# Altium PCB PMP.PcbDoc (part 2 of 2)
Units mil, origin at the board's own origin, x right, y up, seen from the top; angles counter-clockwise.
Board outline 5476.1 x 4612.44 mil, 2 copper layers (Top Layer, Bottom Layer); 198 components, 133 nets, 635 pads, 71 vias.
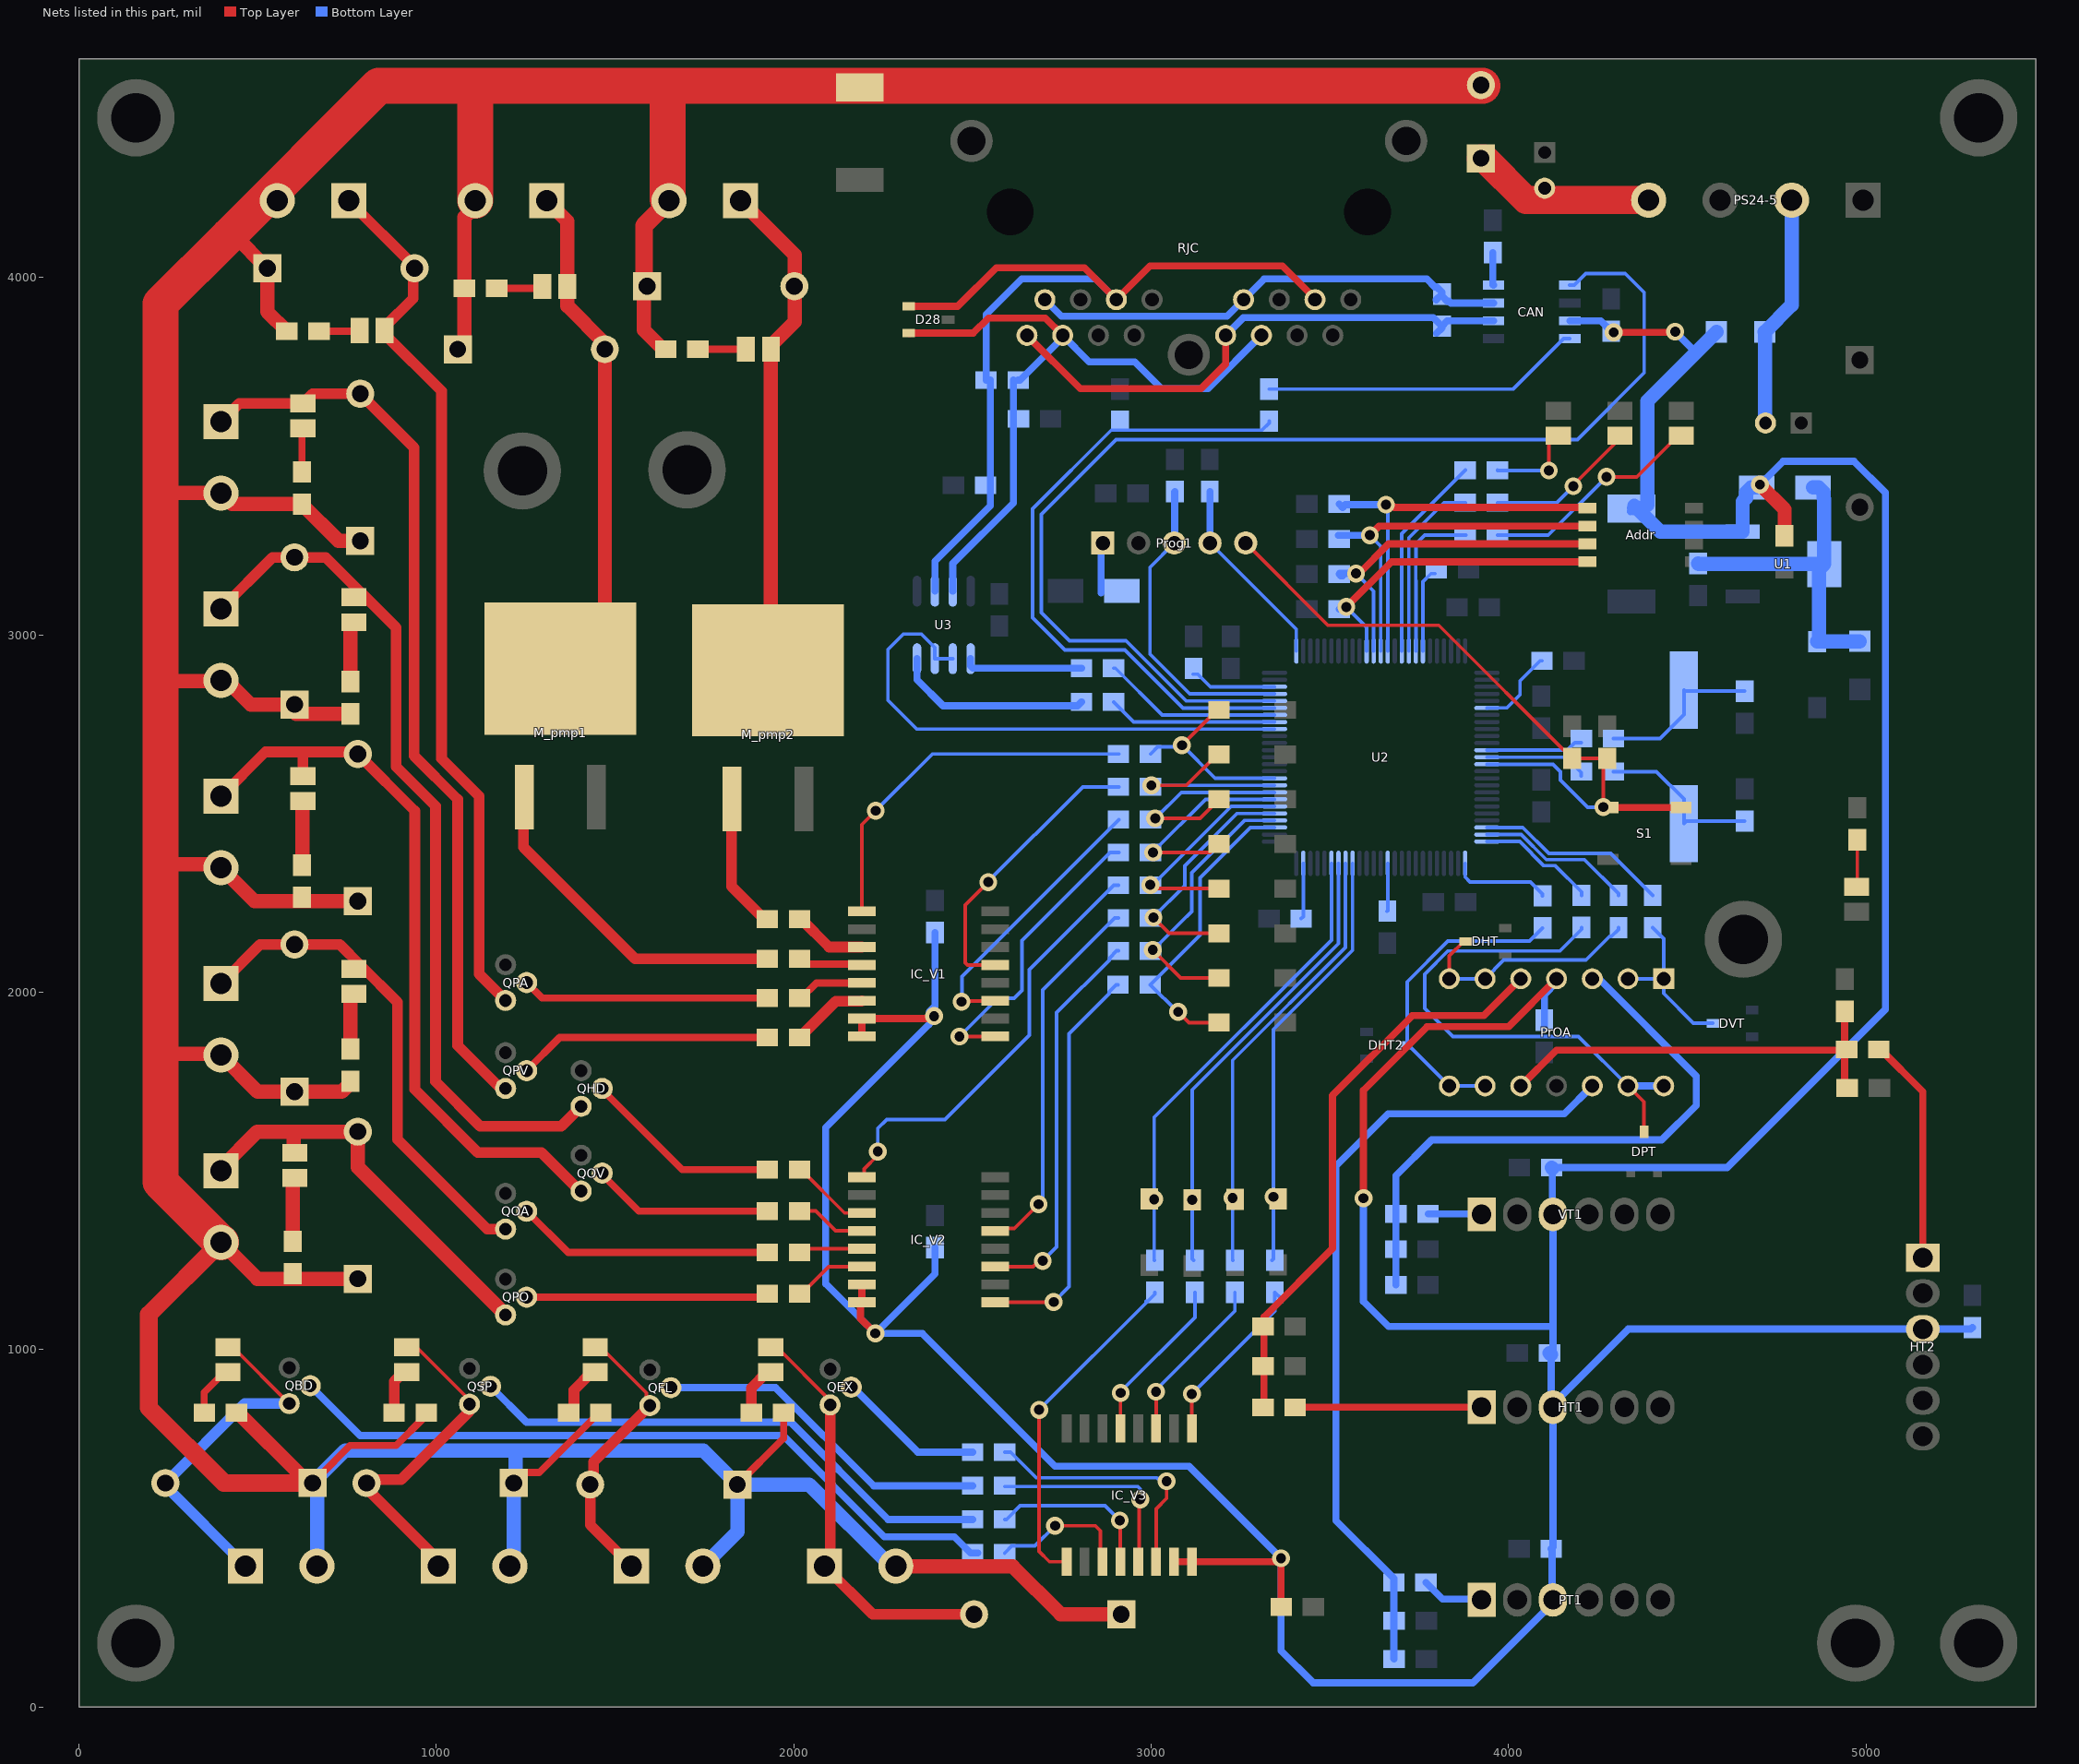
[diagram p2: the nets of this part, all layers, seen from the top]

## Via types
v1: diameter 50, hole 28, Top Layer to Bottom Layer, 71 vias

## Nets (pads, with @x,y where several pads share a name; then routed paths per layer and width w, separated by ;. In a path a pad name is that pad's centre, name@x,y a point inside that pad or via, vN(x,y) a via of type N, cw(c..) or ccw(c..) an arc to the next point about the centre after c; other vN are vias at no path point) (continued)
+5: C1.1 C4.1 C5.1 C7.1 C25.2 C26.1 C27.2 C28.2 C29.2 C30.2 CAN.3 D11.2 D13.1 FU3.2 HT1.3 HT2.3 IC_V1.15 IC_V1.16 IC_V2.15 IC_V2.16 IC_V3.15 IC_V3.16 PrOA.4 PT1.3 U1.3 VT1.3 | length 14117.7
  Top Layer w20: IC_V2.15@2190.55,1182.09 IC_V2.16@2190.55,1132.09 2186.81,1128.34 2186.81,1086.58 v1(2228.46,1044.92) ; IC_V1.16@2190.55,1876.18 IC_V1.15@2190.55,1926.18 2385.83,1926.18 v1(2392.72,1933.07) ; IC_V3.15@3063.98,406.1 IC_V3.16@3113.98,406.1 3354.02,406.1 v1(3363.7,415.79) 3363.7,280.24 C28.2@3364.17,279.76 ; v1(3594.21,1423.46) 3594.21,1725.63 3772.36,1903.78 4000.51,1903.78 PrOA.4@4134.37,2037.64 ; v1(4294.31,3846.69) 4464.29,3846.69 v1(4466.26,3848.66)
  Top Layer w39.37: v1(4703.46,3420.51) 4772.36,3351.61 C26.1@4772.36,3277.24
  Bottom Layer w20: v1@2379.92,1945.87 2395.39,1961.34 C30.2@2395.39,2166.85 ; v1(2392.72,1933.07) 2392.72,1924.95 2378.25,1910.49 2378.25,1909.75 2089.29,1620.79 2089.29,1184.09 v1(2228.46,1044.92) ; C29.2@2395.39,1284.96 2395.39,1211.85 v1(2228.46,1044.92) ; v1(3594.21,1423.46) 3594.21,1134.09 3664.09,1064.21 4121.57,1064.21 4124.53,1067.17 ; C27.2@4100.39,1902.8 4100.39,1993.24 4134.37,2027.22 PrOA.4@4134.37,2037.64 PrOA.4@4135.45,2036.56 ; C5.1@4114.61,990.39 4124.53,1000.32 4124.53,1067.17 ; HT1.3@4119.57,843.78 C5.1@4119.57,985.43 ; C4.1@4120.51,1509.09 4611.93,1509.09 5054.84,1952.01 5054.84,3397.87 4967.24,3485.47 4768.43,3485.47 v1(4703.46,3420.51) ; VT1.3@4122.52,1380.2 C4.1@4122.52,1507.09 ; VT1.3@4124.53,1378.19 4124.53,1067.17 ; CAN.3@4171.46,3878.78 4258.27,3878.78 C25.2@4287.13,3849.92 ; D13.1@4341.26,3344.72 D13.1@4351.52,3354.98 ; v1(4466.26,3848.66) 4524.54,3790.38 ; C7.1@5297.95,1061.54 5293.54,1057.13 HT2.3@5159.17,1057.13 4334.96,1057.13 4124.53,846.69 HT1.3@4124.53,838.82 4124.53,447.17 C1.1@4119.53,442.17 4122.03,439.67 4122.03,301.95 PT1.3@4124.53,299.45 4124.53,291.57 3900.12,67.17 3453.46,67.17 3363.7,156.93 v1(3363.7,415.79) 3106.02,673.46 2731.02,673.46 2359.57,1044.92 v1(2228.46,1044.92)
  Bottom Layer w39.37: C5.1@4114.61,990.39 C5.1@4119.57,985.43 ; HT1.3@4119.57,843.78 HT1.3@4124.53,838.82 ; C4.1@4120.51,1509.09 C4.1@4122.52,1507.09 ; VT1.3@4122.52,1380.2 VT1.3@4124.53,1378.19 ; D13.1@4352.09,3361.46 4358.56,3354.98 4424.92,3288.62 U1.3@4655.24,3288.62 4655.24,3373.27 4665.08,3383.11 4665.08,3398.86 4678.86,3412.64 D11.2@4694.61,3412.64 ; D11.2@4698.54,3420.51 v1(4703.46,3420.51)
  Bottom Layer w40: D13.1@4351.52,3354.98 4358.56,3354.98 4379.07,3354.98 4388.19,3364.09 4388.19,3654.04 4524.54,3790.38 FU3.2@4581.83,3847.68
+24: BD.2 D1.2 D2.2 D3.2 D4.2 D5.2 D6.2 D7.2 D8.2 D9.2 D10.2 D12.1 D15.2 D16.2 EX.2 FL.2 FU2.2 HD.2 OA.2 OV.2 PA.2 PO.2 Pump1.2 Pump2.2 PV.2 R10.1 R29.1 R30.1 R31.1 R32.1 R33.1 R34.1 R35.1 R36.1 R37.1 R44.1 R45.1 SP.2 | length 17119.2
  Top Layer w20: D1.2@634.09,645.59 672.83,645.59 758.78,731.54 887.52,731.54 966.89,810.91 966.89,823.07 R32.1@971.89,823.07 ; D5.2@1216.46,626.22 1245.83,655.59 1287.6,655.59 1455.08,823.07 R30.1@1460.08,823.07 ; D2.2@1842.24,622.28 1971.61,751.65 R33.1@1971.61,823.07
  Top Layer w40: 228.07,1827.01 394.41,1827.01 OA.2@397.36,1824.06 499.72,1721.69 D10.2@603.07,1721.69 735.47,1721.69 759.57,1745.79 R34.1@759.57,1750.79 ; 228.07,2357.52 388.11,2357.52 OV.2@397.36,2348.27 490.67,2254.96 D7.2@780.24,2254.96 ; 228.07,2870.31 395.2,2870.31 HD.2@397.36,2872.48 413.17,2872.48 480.49,2805.16 D8.2@581.42,2805.16 ; 228.07,3367.36 257.4,3396.69 PV.2@397.36,3396.69 428.11,3365.95 R35.1@623.74,3365.95 726.65,3263.03 D9.2@780.24,3263.03 ; PO.2@397.36,1299.84 499.33,1197.87 D16.2@780.24,1197.87 ; 419.51,4117.85 435.06,4117.85 D3.2@527.09,4025.83 527.09,3904.25 R36.1@581.69,3849.65 ; R31.1@440.67,823.07 445.67,823.07 623.15,645.59 634.09,645.59 D1.2@653.46,626.22 ; D8.2@603.07,2805.16 D8.2@581.42,2805.16 ; R29.1@759.57,2779.06 607.52,2779.06 D8.2@581.42,2805.16 ; D4.2@1059.76,3799.45 1078.66,3818.35 R44.1@1078.66,3969.72 1078.66,4169.09 1108.98,4199.4 Pump1.2@1108.98,4215.21 Pump1.2@1116.85,4207.34 ; D15.2@1581.22,3974.45 1581.22,3852.8 R45.1@1638.15,3795.87 ; EX.2@2285.75,392.95 2612.91,392.95 2746.77,259.09 D6.2@2916.26,259.09
  Top Layer w50: PO.2@397.36,1299.84 195.59,1098.07 195.59,836.85 406.22,626.22 D1.2@653.46,626.22 ; D15.2@1575.51,3968.74 1581.22,3974.45 1581.22,4145.13 Pump2.2@1651.3,4215.21 Pump2.2@1647.36,4219.15
  Top Layer w100: PO.2@397.36,1299.84 228.07,1469.13 228.07,1827.01 228.07,2357.52 228.07,2870.31 228.07,3367.36 228.07,3926.42 419.51,4117.85 838.31,4536.65 1108.98,4536.65 ; Pump1.2@1108.98,4215.21 1108.98,4536.65 ; Pump2.2@1647.36,4219.15 1647.36,4536.65 ; FU2.2@3927.87,4536.65 1647.36,4536.65 ; 1108.98,4536.65 1647.36,4536.65
  Bottom Layer w40: BD.2@678.07,392.95 667.05,403.98 667.05,612.64 D1.2@653.46,626.22 745,717.76 1221.18,717.76 ; SP.2@1178.07,392.95 1216.46,431.34 D5.2@1216.46,626.22 1221.18,630.95 1221.18,717.76 ; FL.2@1745.79,392.95 1842.24,489.41 D2.2@1842.24,622.28 ; EX.2@2287.13,393.35 2271.8,393.35 2042.87,622.28 D2.2@1842.24,622.28 ; 1221.18,717.76 1746.77,717.76 D2.2@1842.24,622.28
A_RESET: C13.2 Prog1.5 R51.1 S1.1 U2.14 | length 2004.4
  Top Layer w10: Prog1.5@3264.69,3257.13 3495,3026.81 3805.12,3026.81 C13.2@4177.87,2654.06 R51.1@4265.47,2654.06 ; v1(4265.47,2517.95) R51.1@4265.47,2654.06 ; R51.1@4276.3,2654.06 R51.1@4265.47,2654.06
  Top Layer w20: S1.1@4265.47,2516.97 S1.1@4278.27,2516.97 S1.1@4482.99,2516.97
  Bottom Layer w10: U2.14@3939.68,2638.03 4124.72,2638.03 4145.39,2617.36 4145.39,2593.74 4221.18,2517.95 v1(4265.47,2517.95)
ad0: Addr.1 R12.1 U2.89 | length 1098.9
  Top Layer w20: v1(3657.2,3364.41) 3671.97,3364.41 3679.84,3356.54 Addr.1@4202.87,3356.54
  Bottom Layer w10: v1(3657.2,3364.41) 3662.13,3359.49 U2.89@3662.13,2954.96
  Bottom Layer w20: R12.1@3526.02,3366.38 3535.87,3356.54 3542.76,3363.43 3543.74,3364.41 v1(3657.2,3364.41)
ad1: Addr.2 R14.1 U2.88 | length 1043.4
  Top Layer w20: v1(3611.93,3278.78) 3637.72,3304.57 Addr.2@4220.59,3304.57
  Bottom Layer w10: v1(3611.93,3278.78) 3642.44,3248.27 U2.88@3642.44,2954.96
  Bottom Layer w20: R14.1@3524.33,3278.78 v1(3611.93,3278.78)
ad2: Addr.3 R22.1 U2.87 | length 978.8
  Top Layer w20: v1(3573.22,3171.82) 3581.75,3171.82 3664.49,3254.57 Addr.3@4220.59,3254.57
  Bottom Layer w10: v1(3573.22,3171.82) 3622.76,3122.28 U2.87@3622.76,2954.96
  Bottom Layer w20: R22.1@3535.98,3165.43 3530.78,3165.43 R22.1@3526.02,3170.18 3527.66,3171.82 v1(3573.22,3171.82)
boot: R54.1 U2.94 | length 236.7
  Bottom Layer w10: U2.94@3760.55,2954.96 3760.55,3148.86 3783.19,3171.5 R54.1@3794.02,3171.5
CANH: CAN.7 R65.1 RJC.7 RJC.15 | length 1374
  Bottom Layer w20: RJC.15@2702.68,3938.23 2749.07,3891.84 3212.19,3891.84 RJC.7@3258.58,3938.23 3316.65,3996.3 3771.1,3996.3 3793.7,3973.7 3798.7,3973.7 3813.7,3958.7 R65.1@3813.7,3953.7 ; R65.1@3797.83,3937.83 R65.1@3813.7,3953.7 ; CAN.7@3957.91,3928.78 3838.62,3928.78 3833.7,3933.7 3828.7,3933.7 3813.7,3948.7 R65.1@3813.7,3953.7
CANL: CAN.6 R65.2 RJC.8 RJC.16 | length 1538.7
  Top Layer w20: RJC.16@2652.68,3838.23 2801.69,3689.21 3139.49,3689.21 3208.58,3758.31 RJC.8@3208.58,3838.23
  Bottom Layer w20: RJC.8@3208.58,3838.23 3258.39,3888.03 3789.37,3888.03 R65.2@3813.7,3863.7 ; R65.2@3798.7,3843.7 3813.7,3858.7 R65.2@3813.7,3863.7 ; CAN.6@3957.91,3878.78 3828.7,3878.78 3813.7,3863.78 R65.2@3813.7,3863.7
CANRX: R68.2 R70.1 U2.70 | length 1852.8
  Bottom Layer w10: R68.2@3330.43,3597.95 3330.43,3592.95 3310.43,3572.95 2888.39,3572.95 2668.38,3352.94 2668.38,3048.09 2758.55,2957.91 2926.89,2957.91 3089.29,2795.51 U2.70@3345.2,2795.51
CANRXo: CAN.4 R68.1 | length 899.4
  Bottom Layer w10: R68.1@3330.43,3687.95 3952.17,3687.95 4013.41,3687.95 4154.23,3828.78 CAN.4@4171.46,3828.78
CANTX: CAN.1 U2.71 | length 3348.8
  Bottom Layer w10: U2.71@3345.2,2815.2 3098.15,2815.2 2929.84,2983.5 2771.38,2983.5 2692.64,3062.24 2692.64,3336.85 2902.28,3546.5 4192.64,3546.5 4379.65,3733.5 4379.65,3957.91 4326.5,4011.06 4216.26,4011.06 4183.98,3978.78 CAN.1@4171.46,3978.78
D+: D28.1 R58.2 R59.1 RJC.3 RJC.11 U3.6 | length 2566.9
  Top Layer w19.68: D28.1@2321.57,3919.53 2458.39,3919.53 2566.65,4027.8 2813.11,4027.8 RJC.11@2902.68,3938.23 2997.17,4032.72 3367.83,4032.72 RJC.3@3460.45,3940.1
  Bottom Layer w19.68: U3.6@2395,3122.28 2395,3206.54 2549.92,3361.46 R59.1@2549.92,3712.83 ; R59.1@2538.11,3712.83 2538.11,3896.89 2637.52,3996.3 2844.61,3996.3 RJC.11@2902.68,3938.23
D-: D28.2 R59.2 R60.1 RJC.6 RJC.14 U3.7 | length 1991.8
  Top Layer w19.68: D28.2@2323.54,3842.76 D28.2@2321.57,3844.72 2502.68,3844.72 2545,3887.05 2703.86,3887.05 RJC.14@2752.68,3838.23
  Bottom Layer w19.68: U3.7@2445,3122.28 2445,3199.45 2614.88,3369.33 R59.2@2614.88,3712.83 ; R59.2@2628.11,3712.83 2633.11,3712.83 2752.68,3832.4 RJC.14@2752.68,3838.23 2826.89,3764.02 2954.45,3764.02 3029.25,3689.21 3159.57,3689.21 RJC.6@3308.58,3838.23
DHT: DHT.3 PrOA.6 PrOA.7 R42.1 | length 662.5
  Top Layer w10: PrOA.7@3834.37,2037.64 3834.37,2101.61 3874.72,2141.97 DHT.3@3880.63,2141.97
  Bottom Layer w10: PrOA.7@3834.37,2037.64 PrOA.6@3934.37,2037.64 3986.54,2089.8 4216.97,2089.8 4282.8,2155.63 4287.8,2155.63 4307.8,2175.63 R42.1@4307.8,2180.63
DHT2: DHT2.3 PrOA.8 PrOA.9 R39.1 | length 881.5
  Bottom Layer w10: PrOA.9@3934.37,1737.64 PrOA.8@3834.37,1737.64 3716.85,1855.16 3716.26,1855.75 3716.26,2028.78 3830.43,2142.95 4058.5,2142.95 R39.1@4095.2,2179.65
DPT: DPT.3 PrOA.13 PrOA.14 R62.1 | length 1492.9
  Top Layer w10: PrOA.13@4334.37,1737.64 4378.66,1693.35 DPT.3@4378.66,1613.43
  Bottom Layer w10: R62.1@4204.45,2180.91 4204.45,2175.91 4143.94,2115.39 3830.43,2115.39 3765.47,2050.43 3765.47,1954.96 3844.21,1876.22 4195.79,1876.22 PrOA.13@4334.37,1737.64
  Bottom Layer w20: PrOA.13@4334.37,1737.64 PrOA.14@4434.37,1737.64
DVT: DVT.3 PrOA.1 PrOA.2 R43.2 | length 468.4
  Bottom Layer w10: PrOA.2@4334.37,2037.64 PrOA.1@4434.37,2037.64 ; R43.2@4403.27,2180.63 4434.37,2149.53 PrOA.1@4434.37,2037.64 ; DVT.3@4571.57,1913.62 4517.44,1913.62 4434.37,1996.69 PrOA.1@4434.37,2037.64
EN_max: U2.67 U3.2 U3.3 | length 1503.3
  Bottom Layer w10: U3.2@2445,2933.31 U3.3@2395,2933.31 2395,2964.8 2357.6,3002.2 2306.81,3002.2 2263.5,2958.9 2263.5,2817.17 2344.21,2736.46 U2.67@3345.2,2736.46
HT: R42.2 U2.24 | length 441.7
  Bottom Layer w10: U2.24@3939.68,2441.18 4035.72,2441.18 4105.87,2371.03 4212.39,2371.03 4307.8,2275.63 R42.2@4307.8,2270.63
HT2: R39.2 U2.26 | length 279.6
  Bottom Layer w10: U2.26@3878.66,2360.47 3878.66,2322.09 3892.44,2308.31 4061.54,2308.31 4095.2,2274.65 R39.2@4095.2,2269.65
HT2P: C9.1 PrOA.10 R38.2 R57.1 | length 1171.5
  Top Layer w20: PrOA.10@4034.37,1737.64 4134.57,1837.83 R57.1@4940.67,1837.83 ; C9.1@4940.67,1946.38 R57.1@4940.67,1837.83 ; R57.1@4946.57,1837.83 R57.1@4940.67,1837.83 ; R38.2@4947.83,1731.54 4940.67,1738.7 R57.1@4940.67,1837.83
HTP: C6.1 PrOA.5 R25.2 R26.1 | length 1608.8
  Top Layer w20: R26.1@3315.67,843.74 3315.67,952.99 3315.67,1064.21 3315.67,1090.79 3507.6,1282.72 3507.6,1710.87 3731.02,1934.29 3931.02,1934.29 PrOA.5@4034.37,2037.64
in5: C10.2 FU3.1 PS24-5.2 | length 673.1
  Bottom Layer w40: C10.2@4714.29,3592.76 C10.2@4719.21,3592.76 4718.02,3593.95 4718.02,3846.49 FU3.1@4716.83,3847.68 4792.24,3923.09 PS24-5.2@4792.24,4216.77 ; PS24-5.2@4796.97,4216.77 4796.97,4212.05 PS24-5.2@4802.09,4206.93
in24: C8.2 FU2.1 PS24-5.4 | length 517.7
  Top Layer w78.74: FU2.1@3922.95,4333.7 3932.01,4333.7 4048.94,4216.77 4125.71,4216.77 PS24-5.4@4392.24,4216.77
LEDB: R49.1 U2.92 | length 515.3
  Bottom Layer w10: U2.92@3721.18,2954.96 3721.18,3271.89 3819.11,3369.82 R49.1@3878.94,3369.82
LEDR: R50.1 U2.91 | length 579.4
  Bottom Layer w10: U2.91@3701.5,2954.96 3701.5,3283.42 R50.1@3878.94,3460.87
LEDY: R48.1 U2.93 | length 449.1
  Bottom Layer w10: U2.93@3740.87,2954.96 3740.87,3151.97 3740.48,3152.35 3740.48,3212.29 3740.87,3212.68 3740.87,3254.17 3765.47,3278.78 R48.1@3878.94,3278.78 R48.1@3880.2,3278.78
NetB.D_1: B.D.2 R31.2 | length 146.5
  Top Layer w20: R31.2@350.67,823.07 350.67,879.88 407.05,936.26 B.D.2@417.05,936.26
NetC12_2: C12.2 U2.6 | length 230.8
  Bottom Layer w10: U2.6@3939.68,2795.51 3940.03,2795.86 3995.15,2795.86 4032.2,2832.91 4032.2,2871.1 4088.5,2927.4 C12.2@4093.5,2927.4
Netc14_1: c14.1 R52.2 x1.2 | length 465.4
  Bottom Layer w10: R52.2@4293.74,2709.88 4423.94,2709.88 4490.87,2776.81 x1.2@4490.87,2845.71 4494.09,2842.48 c14.1@4661.14,2842.48
Netc15_1: c15.1 R53.1 x1.1 | length 471.1
  Bottom Layer w10: R53.1@4293.74,2617.36 4414.09,2617.36 4490.87,2540.59 x1.1@4490.87,2471.69 4498.03,2478.86 c15.1@4661.14,2478.86
NetC16_1: C16.1 U2.49 | length 159
  Bottom Layer w10: C16.1@3419.72,2205.94 C16.1@3425.91,2212.13 ; C16.1@3424.92,2210.59 3425.91,2211.57 C16.1@3425.91,2212.13 ; U2.49@3425.91,2360.47 C16.1@3425.91,2212.13
NetC17_1: C17.1 U2.73 | length 243
  Bottom Layer w10: C17.1@3116.85,2890 3130.63,2890 3166.06,2854.57 U2.73@3345.2,2854.57
NetCAN_8: CAN.8 R63.2 | length 92
  Bottom Layer w20: R63.2@3956.42,4070.12 3956.42,3980.28 CAN.8@3957.91,3978.78
NetD14_2: D14.2 Prog1.1 | length 141.7
  Bottom Layer w19.68: 2859.96,3117.36 2859.96,3252.4 Prog1.1@2864.68,3257.13
NetE.X_1: E.X.2 R33.2 | length 141.5
  Top Layer w30: R33.2@1881.61,823.07 1881.61,892.13 1925.75,936.26 E.X.2@1935.75,936.26
NetF.L_1: F.L.2 R30.2 | length 152.8
  Top Layer w30: R30.2@1370.08,823.07 1375.08,823.07 1385.08,833.07 1385.08,886.73 1434.61,936.26 F.L.2@1444.61,936.26
NetH.D_1: H.D.2 R29.2 | length 173
  Top Layer w40: R29.2@759.57,2869.06 759.57,3030.12 764.57,3035.12 H.D.2@769.41,3035.12
NetHT1_1: HT1.1 R26.2 | length 536.6
  Top Layer w19.68: R26.2@3399.06,838.82 3916.65,838.82 3924.53,830.94 HT1.1@3924.53,838.82
NetHT2_1: HT2.1 R57.2 | length 636.6
  Top Layer w20: R57.2@5036.14,1839.8 5041.14,1839.8 5159.17,1721.77 HT2.1@5159.17,1257.13
NetIC_V1_1: IC_V1.1 R11.2 | length 840.8
  Top Layer w10: v1(2463.58,1875.98) 2463.68,1876.08 2563.29,1876.08 IC_V1.1@2563.39,1876.18
  Bottom Layer w10: v1(2463.58,1875.98) 2570.83,1983.23 2617.17,1983.23 2638.78,2004.84 2638.78,2144.21 2885.69,2391.12 R11.2@2908.46,2391.12 R11.2@2909.45,2391.12
NetIC_V1_3: IC_V1.3 R13.1 | length 786.8
  Top Layer w10: v1(2469.49,1973.43) 2470.87,1974.8 2562.01,1974.8 IC_V1.3@2563.39,1976.18
  Bottom Layer w10: v1(2469.49,1973.43) 2470.47,1974.41 2470.47,2043.97 R13.1@2909.45,2482.94
NetIC_V1_5: IC_V1.5 R23.1 | length 817.5
  Top Layer w10: v1(2544.29,2308.07) 2480.32,2244.09 2480.32,2082.04 2486.17,2076.18 IC_V1.5@2563.39,2076.18
  Bottom Layer w10: v1@2540.87,2306.93 2808.69,2574.76 R23.1@2909.45,2574.76
NetIC_V1_9: IC_V1.9 R27.1 | length 1045.1
  Top Layer w10: IC_V1.9@2190.55,2226.18 2190.55,2469.09 v1(2229.33,2507.87)
  Bottom Layer w10: v1@2228.27,2506.93 2387.91,2666.57 R27.1@2909.45,2666.57
NetIC_V2_1: IC_V2.1 R28.2 | length 1129.9
  Top Layer w10: IC_V2.1@2563.39,1132.09 2702.95,1132.09 2703.74,1132.87 v1(2727.36,1132.87)
  Bottom Layer w10: v1(2727.36,1132.87) 2770.39,1175.91 2770.39,1883.82 2882.48,1995.91 2882.48,2000.91 2902.48,2020.91 R28.2@2907.48,2020.91
NetIC_V2_3: IC_V2.3 R61.1 | length 1098.3
  Top Layer w10: IC_V2.3@2563.39,1232.09 2670.08,1232.09 2686.03,1248.03 v1(2696.85,1248.03)
  Bottom Layer w10: v1(2696.85,1248.03) 2735.94,1287.13 2735.94,1943.16 2883.46,2090.67 2883.46,2095.67 2903.46,2115.67 R61.1@2908.46,2115.67
NetIC_V2_5: IC_V2.5 R64.1 | length 1053.9
  Top Layer w10: IC_V2.5@2563.39,1332.09 2570.12,1338.82 2617.36,1338.82 v1(2685.04,1406.5)
  Bottom Layer w10: v1(2685.04,1406.5) v1@2685.04,1412.4 ; v1@2687.99,1409.45 2696.57,1418.03 2696.57,2006.14 2897.92,2207.49 R64.1@2908.46,2207.49
NetIC_V2_9: IC_V2.9 R66.1 | length 1217.7
  Top Layer w10: IC_V2.9@2190.55,1482.09 2196.93,1488.47 2196.93,1505.01 2235.24,1543.31 v1(2235.24,1554.13)
  Bottom Layer w10: v1(2235.24,1554.13) 2235.24,1619.09 2260.08,1643.94 2422.95,1643.94 2659.17,1880.16 2659.17,2063.23 2895.25,2299.31 R66.1@2908.46,2299.31
NetIC_V3_1: IC_V3.1 R67.2 | length 502
  Top Layer w10: IC_V3.1@3113.98,778.94 v1(3113.98,875.79)
  Bottom Layer w10: v1(3113.98,875.79) 3346.18,1107.99 R67.2@3346.18,1159.96 R67.2@3363.7,1142.44
NetIC_V3_3: IC_V3.3 R69.1 | length 472.4
  Top Layer w10: v1(3013.78,881.89) 3013.88,881.79 3013.88,779.04 IC_V3.3@3013.98,778.94
  Bottom Layer w10: v1(3013.78,881.89) 3013.78,886.81 3234.3,1107.34 R69.1@3234.3,1159.96
NetIC_V3_5: IC_V3.5 R72.1 | length 477
  Top Layer w10: IC_V3.5@2913.98,778.94 2914.42,779.38 2914.42,878 v1(2914.86,878.44)
  Bottom Layer w10: v1@2906.05,873.57 2910.93,878.44 v1(2914.86,878.44) ; v1@2912.89,880.41 3122.43,1089.95 R72.1@3122.43,1159.96
NetIC_V3_9: IC_V3.9 R74.1 | length 953.4
  Top Layer w10: v1(2686.73,831.14) 2686.73,434.76 2715.39,406.1 IC_V3.9@2763.98,406.1
  Bottom Layer w10: v1(2686.73,831.14) R74.1@2990.55,1134.96 ; R74.1@2985.55,1134.96 R74.1@2990.55,1134.96 ; R74.1@3010.55,1159.96 3010.55,1154.96 R74.1@2990.55,1134.96
NetLEDB1_1: LEDB1.2 R49.2 | length 434.6
  Top Layer w10: v1(4181.44,3415.92) 4181.44,3419.31 4315.51,3553.39 LEDB1.2@4325.51,3553.39
  Bottom Layer w10: R49.2@3968.94,3369.82 4135.34,3369.82 v1(4181.44,3415.92)
NetLEDG1_1: LEDG1.2 R46.2 | length 132.6
  Top Layer w10: LEDG1.2@4974.13,2294.65 4976.1,2296.61 R46.2@4976.1,2426.42
NetLEDR1_1: LEDR1.2 R50.2 | length 265.6
  Top Layer w10: v1(4112.91,3459.88) 4112.91,3543.54 4127.4,3558.03 4133.8,3551.63 LEDR1.2@4139.49,3545.94
  Bottom Layer w10: R50.2@3968.94,3460.87 3969.92,3459.88 v1(4112.91,3459.88)
NetLEDY1_1: LEDY1.2 R48.2 | length 630.4
  Top Layer w10: v1(4274.33,3442.17) 4358.82,3442.17 4473.98,3557.32 LEDY1.2@4483.98,3557.32
  Bottom Layer w10: R48.2@3968.94,3278.78 4110.94,3278.78 v1(4274.33,3442.17)
NetM_pmp1_1: M_pmp1.1 R5.2 | length 963.2
  Top Layer w30: M_pmp1.1@1243.82,2557.32 1243.82,2405.75 1555.83,2093.74 R5.2@1926.18,2093.74
NetM_pmp2_1: M_pmp2.1 R6.2 | length 288.6
  Top Layer w30: 1825.51,2446.1 1825.51,2296.5 1918.03,2203.98 R6.2@1926.18,2203.98
NetO.A_1: O.A.2 R34.2 | length 160.5
  Top Layer w40: R34.2@759.57,1840.79 759.57,1990.31 764.57,1995.31 O.A.2@768.43,1995.31
NetO.V_1: O.V.2 R37.2 | length 180.4
  Top Layer w40: R37.2@623.74,2355.55 625.22,2357.03 625.22,2533.21 O.V.2@626.69,2534.69
NetP.A_1: P.A.2 R36.2 | length 106.3
  Top Layer w20: R36.2@671.69,3849.65 775.2,3849.65 P.A.2@777.17,3851.61
NetP.O_1: P.O.2 R10.2 | length 181.1
  Top Layer w40: R10.2@598.15,1302.4 598.15,1475.55 603.15,1480.55 P.O.2@604.06,1480.55
NetP.V_1: P.V.2 R35.2 | length 124
  Top Layer w19.68: R35.2@623.74,3452.01 P.V.2@623.74,3576.02
NetPMP1_1: PMP1.2 R44.2 | length 130
  Top Layer w20: R44.2@1168.66,3969.72 1291.69,3969.72 PMP1.2@1296.61,3974.65
NetPMP2_1: PMP2.2 R45.2 | length 134.6
  Top Layer w20: R45.2@1731.73,3799.45 PMP2.2@1866.3,3799.45
NetPT1_1: PT1.1 R16.2 | length 175.4
  Bottom Layer w20: R16.2@3769.13,347.68 3815.39,301.42 3922.56,301.42 PT1.1@3924.53,299.45
NetQBD_2: QBD.2 R1.2 | length 2061.1
  Bottom Layer w20: QBD.2@647.36,898.66 786.93,759.09 1970.2,759.09 2253.66,475.63 2449.53,475.63 2494.8,430.35 R1.2@2500.28,430.35 R1.2@2514.49,430.35
NetQEX_2: QEX.2 R8.2 | length 405.1
  Bottom Layer w20: QEX.2@2169.02,890.98 2347.17,712.83 R8.2@2500.28,712.83
NetQFL_2: QFL.2 R2.2 | length 957.5
  Bottom Layer w20: QFL.2@1656.42,893.15 1949.33,893.15 2223.81,618.67 R2.2@2500.28,618.67
NetQHD_2: QHD.2 R17.2 | length 554.4
  Top Layer w20: QHD.2@1464.29,1726.61 1687.65,1503.26 R17.2@1926.18,1503.26
NetQOA_2: QOA.2 R19.2 | length 721
  Top Layer w20: QOA.2@1253.2,1387.51 1369.12,1271.58 R19.2@1926.18,1271.58
NetQOV_2: QOV.2 R9.2 | length 504.1
  Top Layer w20: QOV.2@1464.29,1489.41 1566.28,1387.42 R9.2@1926.18,1387.42
NetQPA_2: QPA.2 R3.2 | length 691.4
  Top Layer w19.68: QPA.2@1252.68,2026.81 1295.98,1983.5 R3.2@1926.18,1983.5
NetQPO_2: QPO.2 R4.2 | length 677
  Top Layer w20: QPO.2@1253.07,1146.3 1911.73,1146.3 1921.18,1155.75 R4.2@1926.18,1155.75
NetQPV_2: QPV.2 R18.2 | length 712
  Top Layer w20: QPV.2@1252.58,1780.65 1345.2,1873.27 R18.2@1926.18,1873.27
NetQSP_2: QSP.2 R7.2 | length 1502.6
  Bottom Layer w20: QSP.2@1151.89,896.89 1252.16,796.62 1991.72,796.62 2263.83,524.51 R7.2@2500.28,524.51
NetR21_2: R21.2 VT1.1 | length 149.9
  Bottom Layer w20: R21.2@3775.04,1379.17 3923.54,1379.17 VT1.1@3924.53,1378.19
NetR32_2: R32.2 S.P.2 | length 133.6
  Top Layer w30: R32.2@881.89,823.07 881.89,911.1 907.05,936.26 S.P.2@917.05,936.26
NetR40_1: R40.1 U3.1 | length 332.8
  Bottom Layer w20: U3.1@2495,2933.31 2495,2913.43 2501.69,2906.73 R40.1@2805.12,2906.73
NetR41_1: R41.1 U3.4 | length 553.7
  Bottom Layer w20: U3.4@2345,2933.31 2345,2874.45 2418.03,2801.42 2794.29,2801.42 R41.1@2805.12,2812.24
NetR47_1: R47.1 U2.37 | length 134.9
  Bottom Layer w10: R47.1@3660.16,2226.34 3662.13,2228.31 U2.37@3662.13,2360.47
NetR52_1: R52.1 U2.12 | length 272.6
  Bottom Layer w10: U2.12@3939.68,2677.4 4165.08,2677.4 4185.75,2698.07 R52.1@4203.74,2698.07
NetR53_2: R53.2 U2.13 | length 291.3
  Bottom Layer w10: U2.13@3939.68,2657.72 4161.14,2657.72 4203.74,2615.12 R53.2@4203.74,2605.55
pre_+3.3: C11.1 D11.1 D27.2 FU1.1 U1.2 U1.4 | length 935.1
  Bottom Layer w40: C11.1@4530.24,3199.76 4531.61,3198.39 4654.92,3198.39 U1.2@4655.24,3198.07 U1.4@4883.58,3198.07 ; D11.1@4852.09,3412.64 4867.83,3412.64 4881.3,3399.17 4881.3,3383.43 4883.58,3381.14 U1.4@4883.58,3198.07 ; D27.2@4863.62,2981.3 D27.2@4864.03,2981.7 ; FU1.1@4982.99,2982.11 4982.59,2981.7 D27.2@4864.03,2981.7 ; D27.2@4864.03,2981.7 4868.62,2986.3 4868.62,3183.11 U1.4@4883.58,3198.07
PT: R62.2 U2.25 | length 332.9
  Bottom Layer w10: U2.25@3939.68,2421.5 4031.37,2421.5 4098.83,2354.03 4131.17,2354.03 4204.45,2280.75 R62.2@4204.45,2270.91
PTP: C2.1 PrOA.12 R15.2 R16.1 | length 2256.9
  Bottom Layer w20: C2.1@3680.12,134.09 3679.13,135.08 3679.13,240.39 3679.13,359.21 3517.44,520.91 3517.44,1514.02 3663.11,1659.69 4156.42,1659.69 PrOA.12@4234.37,1737.64
RXD_Bus: R40.2 U2.69 | length 504.3
  Bottom Layer w10: R40.2@2895.12,2906.73 2900.12,2906.73 3031.02,2775.83 U2.69@3345.2,2775.83
S_bd: B.D.1 BD.1 D1.1 QBD.3 | length 1051.5
  Top Layer w10: B.D.1@417.05,1006.26 430.71,1006.26 QBD.3@588.31,848.66
  Top Layer w30: D1.1@241.65,618.35 D1.1@241.65,626.22
  Bottom Layer w30: D1.1@244.61,623.27 D1.1@241.65,626.22 ; BD.1@458.39,412.64 BD.1@466.06,404.96 ; BD.1@478.07,392.95 BD.1@466.06,404.96 ; QBD.3@588.31,848.66 464.09,848.66 D1.1@241.65,626.22 ; D1.1@241.65,626.22 241.65,618.35 BD.1@466.06,393.94 BD.1@466.06,404.96
S_EX: D6.1 E.X.1 EX.1 QEX.3 | length 1172.7
  Top Layer w10: E.X.1@1935.75,1006.26 1953.35,1006.26 2101.89,857.72 QEX.3@2101.89,844.92 ; EX.1@2085.75,393.94 EX.1@2101.89,410.08
  Top Layer w30: EX.1@2085.75,393.94 2220.59,259.09 D6.1@2504.45,259.09 ; EX.1@2101.89,410.08 QEX.3@2101.89,844.92
S_fl: D2.1 F.L.1 FL.1 QFL.3 | length 801.7
  Top Layer w10: F.L.1@1444.61,1006.26 1460.24,1006.26 1587.98,878.52 1587.98,852.54 QFL.3@1597.36,843.15
  Top Layer w30: FL.1@1545.85,393.94 1430.43,509.36 D2.1@1430.43,622.28 1439.76,631.61 1439.76,685.55 QFL.3@1597.36,843.15
S_hd: D8.1 H.D.1 HD.1 QHD.3 | length 2429.4
  Top Layer w30: HD.1@397.36,3072.48 541.85,3216.97 D8.1@603.07,3216.97 690.47,3216.97 887.52,3019.92 887.52,2631.14 997.76,2520.91 997.76,1749.85 1122.49,1625.12 1350,1625.12 QHD.3@1405.24,1680.35
S_OA: D10.1 O.A.1 OA.1 QOA.3 | length 1396.4
  Top Layer w30: OA.1@397.36,2024.06 506.81,2133.5 D10.1@603.07,2133.5 729.65,2133.5 788.62,2074.53 891.46,1971.69 891.46,1587.83 1142.3,1336.99 QOA.3@1193.62,1336.99
S_OV: D7.1 O.V.1 OV.1 QOV.3 | length 2098
  Top Layer w30: OV.1@397.36,2548.27 521.57,2672.48 635.55,2672.48 ; O.V.1@626.69,2604.69 626.69,2663.62 635.55,2672.48 ; QOV.3@1405.24,1440.2 1294.02,1551.42 1115.87,1551.42 939.68,1727.6 939.68,2507.32 D7.1@780.24,2666.77 774.53,2672.48 635.55,2672.48
S_Pa: D3.1 P.A.1 PA.1 QPA.3 | length 2489.6
  Top Layer w30: PA.1@754.84,4215.21 938.9,4031.16 D3.1@938.9,4025.83 934.88,4021.81 934.88,3941.46 855.04,3861.61 P.A.1@855.04,3851.61 855.04,3841.61 1014.49,3682.17 1014.49,2653.78 1119.8,2548.46 1119.8,2050.63 QPA.3@1193.62,1976.81
S_PMP1: D4.1 M_pmp1.2 PMP1.1 Pump1.1 | length 1412.5
  Top Layer w40: Pump1.1@1308.98,4215.21 1366.61,4157.58 PMP1.1@1366.61,3974.65 1366.61,3920.3 D4.1@1471.57,3815.34 ; M_pmp1.2@1347.17,2905.75 1471.57,3030.16 D4.1@1471.57,3799.45
S_PMP2: D15.1 M_pmp2.2 PMP2.1 Pump2.1 | length 1435.6
  Top Layer w40: Pump2.1@1851.3,4215.21 2002.68,4063.83 2002.68,3875.83 1936.3,3809.45 PMP2.1@1936.3,3799.45 1936.3,2909.25 M_pmp2.2@1927.87,2900.83 M_pmp2.2@1955.43,2900.83
S_PO: D16.1 P.O.1 PO.1 QPO.3 | length 1177.8
  Top Layer w40: PO.1@397.36,1499.84 397.36,1508.11 498.94,1609.69 601.1,1609.69 ; P.O.1@604.06,1550.55 601.1,1553.5 601.1,1609.69 ; QPO.3@1193.62,1096.69 780.24,1510.08 D16.1@780.24,1609.69 601.1,1609.69
S_PV: D9.1 P.V.1 PV.1 QPV.3 | length 2543.6
  Top Layer w30: PV.1@397.36,3596.69 448.54,3647.87 P.V.1@626.69,3647.87 653.46,3674.65 D9.1@787.13,3674.65 D9.1@788.11,3673.66 ; D9.1@788.11,3674.65 D9.1@788.11,3673.66 ; QPV.3@1193.62,1730.55 1179.84,1730.55 1059.76,1850.63 1059.76,2539.61 937.72,2661.65 937.72,3524.06 D9.1@788.11,3673.66
S_sp: D5.1 QSP.3 S.P.1 SP.1 | length 955.4
  Top Layer w10: S.P.1@917.05,1006.26 944.49,1006.26 1092.83,857.91 QSP.3@1092.83,846.89
  Top Layer w30: SP.1@1005.96,393.94 1005.96,410.34 804.65,611.65 D5.1@804.65,626.22 813.97,635.55 901.77,635.55 1092.83,826.61 QSP.3@1092.83,846.89
SWCLK: Prog1.4 R56.1 U2.76 | length 546.4
  Bottom Layer w10: R56.1@3164.09,3401.1 R56.1@3164.68,3400.51 ; Prog1.4@3164.68,3257.13 3406.22,3015.59 U2.76@3406.22,2954.96
  Bottom Layer w20: Prog1.4@3164.68,3257.13 R56.1@3164.68,3400.51
SWDIO: Prog1.3 R55.1 U2.72 | length 878.4
  Bottom Layer w10: Prog1.3@3064.68,3257.13 2996.77,3189.21 2996.77,2946.1 3107.99,2834.88 U2.72@3345.2,2834.88
  Bottom Layer w20: Prog1.3@3064.68,3257.13 3065.67,3258.11 3065.67,3400.12 R55.1@3066.65,3401.1
Testmode: Addr.4 R24.1 U2.86 | length 896
  Top Layer w20: v1(3546.34,3077.99) 3672.91,3204.57 Addr.4@4220.59,3204.57
  Bottom Layer w10: v1(3546.34,3077.99) 3603.07,3021.26 U2.86@3603.07,2954.96
  Bottom Layer w20: R24.1@3526.02,3072.09 3531.93,3077.99 v1(3546.34,3077.99)
TXD_Bus: R41.2 U2.68 | length 473.3
  Bottom Layer w10: R41.2@2895.12,2812.24 2951.22,2756.14 U2.68@3345.2,2756.14
uEX: IC_V1.13 R3.1 | length 192
  Top Layer w20: R3.1@2016.18,1983.5 2021.18,1983.5 2063.27,2025.59 2189.96,2025.59 IC_V1.13@2190.55,2026.18
uHD: IC_V2.11 R17.1 | length 224.6
  Top Layer w10: R17.1@2016.18,1503.26 2021.18,1503.26 2142.35,1382.09 IC_V2.11@2190.55,1382.09
uHD2: IC_V3.13 R2.1 | length 588
  Top Layer w10: IC_V3.13@2963.98,406.1 2966.73,408.86 2966.73,577.95 v1(2969.49,580.71)
  Bottom Layer w10: R2.1@2590.28,616.38 2963.11,616.38 2969.49,610 v1(2969.49,580.71)
uOA: IC_V2.13 R19.1 | length 178.7
  Top Layer w10: R19.1@2016.18,1271.58 2026.68,1282.09 IC_V2.13@2190.55,1282.09
uOA2: IC_V3.11 R1.1 | length 394.2
  Top Layer w10: v1(2731.3,506.89) 2843.5,506.89 2857.68,492.72 2857.68,412.4 IC_V3.11@2863.98,406.1
  Bottom Layer w10: R1.1@2590.28,430.35 2610.28,450.35 2674.76,450.35 v1(2731.3,506.89)
uOV: IC_V2.12 R9.1 | length 197.3
  Top Layer w10: R9.1@2016.18,1387.42 2061.4,1387.42 2116.73,1332.09 IC_V2.12@2190.55,1332.09
uOV2: IC_V3.12 R7.1 | length 471.4
  Top Layer w10: v1(2912.4,521.65) 2913.19,520.87 2913.19,406.89 IC_V3.12@2913.98,406.1
  Bottom Layer w10: R7.1@2590.28,524.51 2595.28,524.51 2633.75,562.99 2871.06,562.99 v1(2912.4,521.65)
uPA: IC_V3.14 R8.1 | length 724.2
  Top Layer w10: IC_V3.14@3013.98,406.1 3013.98,554.33 3043.31,583.66 v1(3043.31,631.46)
  Bottom Layer w10: R8.1@2590.28,712.83 2607.01,712.83 2678.86,640.98 3015.75,640.98 3017.61,639.12 3035.65,639.12 v1(3043.31,631.46)
uPMP1: IC_V1.12 R5.1 | length 181.6
  Top Layer w20: R5.1@2016.18,2093.74 2031.18,2078.74 2187.99,2078.74 IC_V1.12@2190.55,2076.18
uPMP2: IC_V1.11 R6.1 | length 206.6
  Top Layer w30: R6.1@2016.18,2203.98 2021.18,2203.98 2098.98,2126.18 IC_V1.11@2190.55,2126.18
uPO: IC_V2.14 R4.1 | length 206
  Top Layer w10: R4.1@2016.18,1155.75 2021.18,1155.75 2097.52,1232.09 IC_V2.14@2190.55,1232.09
upump: D19.2 R23.2 U2.59 | length 565.3
  Top Layer w10: v1(3000.71,2578.98) 3099.02,2578.98 3184.92,2664.88 D19.2@3189.92,2664.88
  Bottom Layer w10: R23.2@3005.35,2577.29 3007.04,2578.98 U2.59@3345.2,2578.98
upump2: D17.2 R27.2 U2.60 | length 533.1
  Top Layer w10: v1(3086.34,2691.3) 3184.92,2789.88 D17.2@3189.92,2789.88
  Bottom Layer w10: R27.2@2998.46,2666.57 3018.46,2686.57 v1@3081.61,2686.57 ; v1(3086.34,2691.3) 3178.98,2598.66 U2.60@3345.2,2598.66
uPV: IC_V1.14 R18.1 | length 219.9
  Top Layer w30: R18.1@2016.18,1873.27 2021.18,1873.27 2031.18,1883.27 2031.18,1888.27 2117.87,1974.96 2189.33,1974.96 IC_V1.14@2190.55,1976.18
VEX: D30.2 R13.2 U2.58 | length 571.1
  Top Layer w10: v1(3011.54,2486.46) 3136.5,2486.46 D30.2@3189.92,2539.88
  Bottom Layer w10: R13.2@3005.35,2485.05 3010.35,2485.05 3084.6,2559.29 U2.58@3345.2,2559.29
VHD: D22.2 R66.2 U2.56 | length 634.6
  Top Layer w10: v1(2997.76,2300.43) 3008.31,2289.88 D22.2@3189.92,2289.88
  Bottom Layer w10: R66.2@2998.46,2299.31 3003.46,2299.31 3224.08,2519.92 U2.56@3345.2,2519.92
VHD2: D25.2 R69.2 U2.43 | length 1248.8
  Bottom Layer w10: R69.2@3228.73,1249.96 3228.07,1250.62 v1(3228.07,1424.45) ; v1@3228.73,1431.34 3228.07,1430.68 v1(3228.07,1424.45) ; U2.43@3544.02,2360.47 3544.02,2125.24 3228.07,1809.29 v1(3228.07,1424.45)
VOA: D24.2 R61.2 U2.54 | length 778.8
  Top Layer w10: v1(3004.65,2118.35) 3083.11,2039.88 D24.2@3189.92,2039.88
  Bottom Layer w10: R61.2@2998.46,2115.67 3003.46,2115.67 3092.5,2204.71 3103.32,2215.53 3113.9,2226.11 3113.9,2333.9 3260.55,2480.55 U2.54@3345.2,2480.55
VOA2: D26.2 R74.2 U2.45 | length 1346.3
  Bottom Layer w10: R74.2@3009.57,1249.96 3008.58,1250.94 v1(3008.58,1420.51) ; 3009.57,1450.04 3008.58,1449.06 v1(3008.58,1420.51) ; U2.45@3504.65,2360.47 3504.65,2145.91 3008.58,1649.84 v1(3008.58,1420.51)
VOV: D21.2 R64.2 U2.55 | length 701.9
  Top Layer w10: v1(3006.61,2208.9) 3050.63,2164.88 D21.2@3189.92,2164.88
  Bottom Layer w10: R64.2@2998.46,2207.49 3003.46,2207.49 3094.21,2298.24 3094.21,2353.58 3240.87,2500.24 U2.55@3345.2,2500.24
VOV2: D29.2 R72.2 U2.44 | length 1308
  Bottom Layer w10: R72.2@3119.15,1249.96 3115.07,1254.04 v1(3115.07,1418.54) ; v1@3119.15,1443.15 3115.07,1439.07 v1(3115.07,1418.54) ; U2.44@3524.33,2360.47 3524.33,2136.06 3115.07,1726.8 v1(3115.07,1418.54)
VPA: D23.2 R67.1 U2.42 | length 1228.1
  Bottom Layer w10: R67.1@3338.31,1249.96 3342.24,1253.9 v1(3342.24,1427.4) ; v1@3338.31,1404.76 3342.24,1408.7 v1(3342.24,1427.4) ; U2.42@3563.7,2360.47 3563.7,2117.36 3342.24,1895.91 v1(3342.24,1427.4)
VPO: D20.2 R28.1 U2.53 | length 860.1
  Top Layer w10: v1(3075.51,1945.12) 3105.75,1914.88 D20.2@3189.92,1914.88
  Bottom Layer w10: v1(3075.51,1945.12) 3073.27,1945.12 R28.1@2997.48,2020.91 3136.54,2159.96 3136.54,2320.12 3277.28,2460.87 U2.53@3345.2,2460.87
VPV: D18.2 R11.1 U2.57 | length 594.8
  Top Layer w10: v1(3005.63,2390.98) 3166.02,2390.98 D18.2@3189.92,2414.88
  Bottom Layer w10: R11.1@3005.35,2392.81 3152.15,2539.61 U2.57@3345.2,2539.61
VT: R43.1 U2.23 | length 542.4
  Bottom Layer w10: U2.23@3939.68,2460.87 4040.08,2460.87 4112.91,2388.03 4285.72,2388.03 4352.92,2320.83 4353.06,2320.83 R43.1@4403.27,2270.63
VTP: C3.1 PrOA.3 R20.2 R21.1 | length 1713.6
  Bottom Layer w20: C3.1@3685.04,1180.35 R20.2@3685.04,1280.75 R21.1@3685.04,1379.17 3685.04,1486.73 3785.16,1586.85 4428.86,1586.85 4525.31,1683.31 4525.31,1765 4252.68,2037.64 PrOA.3@4234.37,2037.64
pads on no net: CAN.5 HT1.4 HT1.5 HT1.6 HT2.4 HT2.5 HT2.6 PT1.4 PT1.5 PT1.6 RJC.1 RJC.2 RJC.9 RJC.10 RJC.P U2.1 U2.2 U2.3 U2.4 U2.5 U2.7 U2.8 U2.9 U2.15 U2.16 U2.17 U2.18 U2.29 U2.30 U2.31 U2.32 U2.33 U2.34 U2.35 U2.36 U2.38 U2.39 U2.40 U2.41 U2.46 U2.47 U2.48 U2.51 U2.52 U2.61 U2.62 U2.63 U2.64 U2.65 U2.66 U2.77 U2.78 U2.79 U2.80 U2.81 U2.82 U2.83 U2.84 U2.85 U2.90 U2.95 U2.96 U2.97 U2.98 VT1.4 VT1.5 VT1.6

## Polygon pours and split planes (outlines as drawn)
5GND on Top Layer "5GND_L01_P000" (solid, pour order 0): 3.94,4610.24 1.97,4608.27 1.97,2.95 5470.47,2.95 5475.39,7.87 5472.44,10.83 5472.44,4608.27
5GND on Bottom Layer "5GND_L02_P001" (solid, pour order 1): 6.89,4608.27 6.89,4.92 7.87,3.94 5469.49,3.94 5469.49,4607.28 5471.46,4609.25

## Keep-outs
Keep-Out Layer:
  the board outline again, w7.87

## Silkscreen, mask and mechanical layers (free items; w line width, h text height)
Top Overlay:
  lines w10: 3981.02,3133.11 3981.02,3398.86 ; 4077.48,3135.08 4077.48,3400.83
  text "+5" at 4847.17,4098.66 h50 r180
  text "-5" at 5036.14,4097.68 h50 r180
  text "+24" at 4446.57,4095.71 h50 r180
  text "-24" at 4658.19,4095.71 h50 r180
  text "Off" at 4099.13,3349.68 h25
  text "On" at 3913.11,3345.74 h25
  text "Off" at 3999.72,3345.74 h25
  text "A1" at 3835.35,3343.74 h30
  text "Off" at 4099.13,3298.46 h25
  text "Off" at 3912.13,3294.53 h25
  text "On" at 3999.72,3294.53 h25
  text "A2" at 3835.35,3292.53 h30
  text "On" at 4099.13,3247.97 h25
  text "Off" at 3912.13,3244.03 h25
  text "Off" at 3999.72,3244.03 h25
  text "A3" at 3835.35,3242.03 h30
  text "P3" at 4103.07,3211.85 h40 r270
  text "P1" at 3918.03,3207.91 h40 r270
  text "P2" at 4009.57,3207.91 h40 r270
  text "TM" at 3835.35,3191.18 h30
  text "PUMP V7.1" at 5296.97,2397.87 h100 r90

## Text inside footprints (layer, text, board x,y; h text height)
FU2: Top Overlay "F" at 3950.51,4425.43 h60 r90